# Altium PCB SD2_V1.2.PcbDoc
Units mil, origin at the board's own origin, x right, y up, seen from the top; angles counter-clockwise.
Board outline 1397.64 x 1122.05 mil, 2 copper layers (Top Layer, Bottom Layer), stack 46.457 mil thick; 30 components, 34 nets, 137 pads, 76 vias.
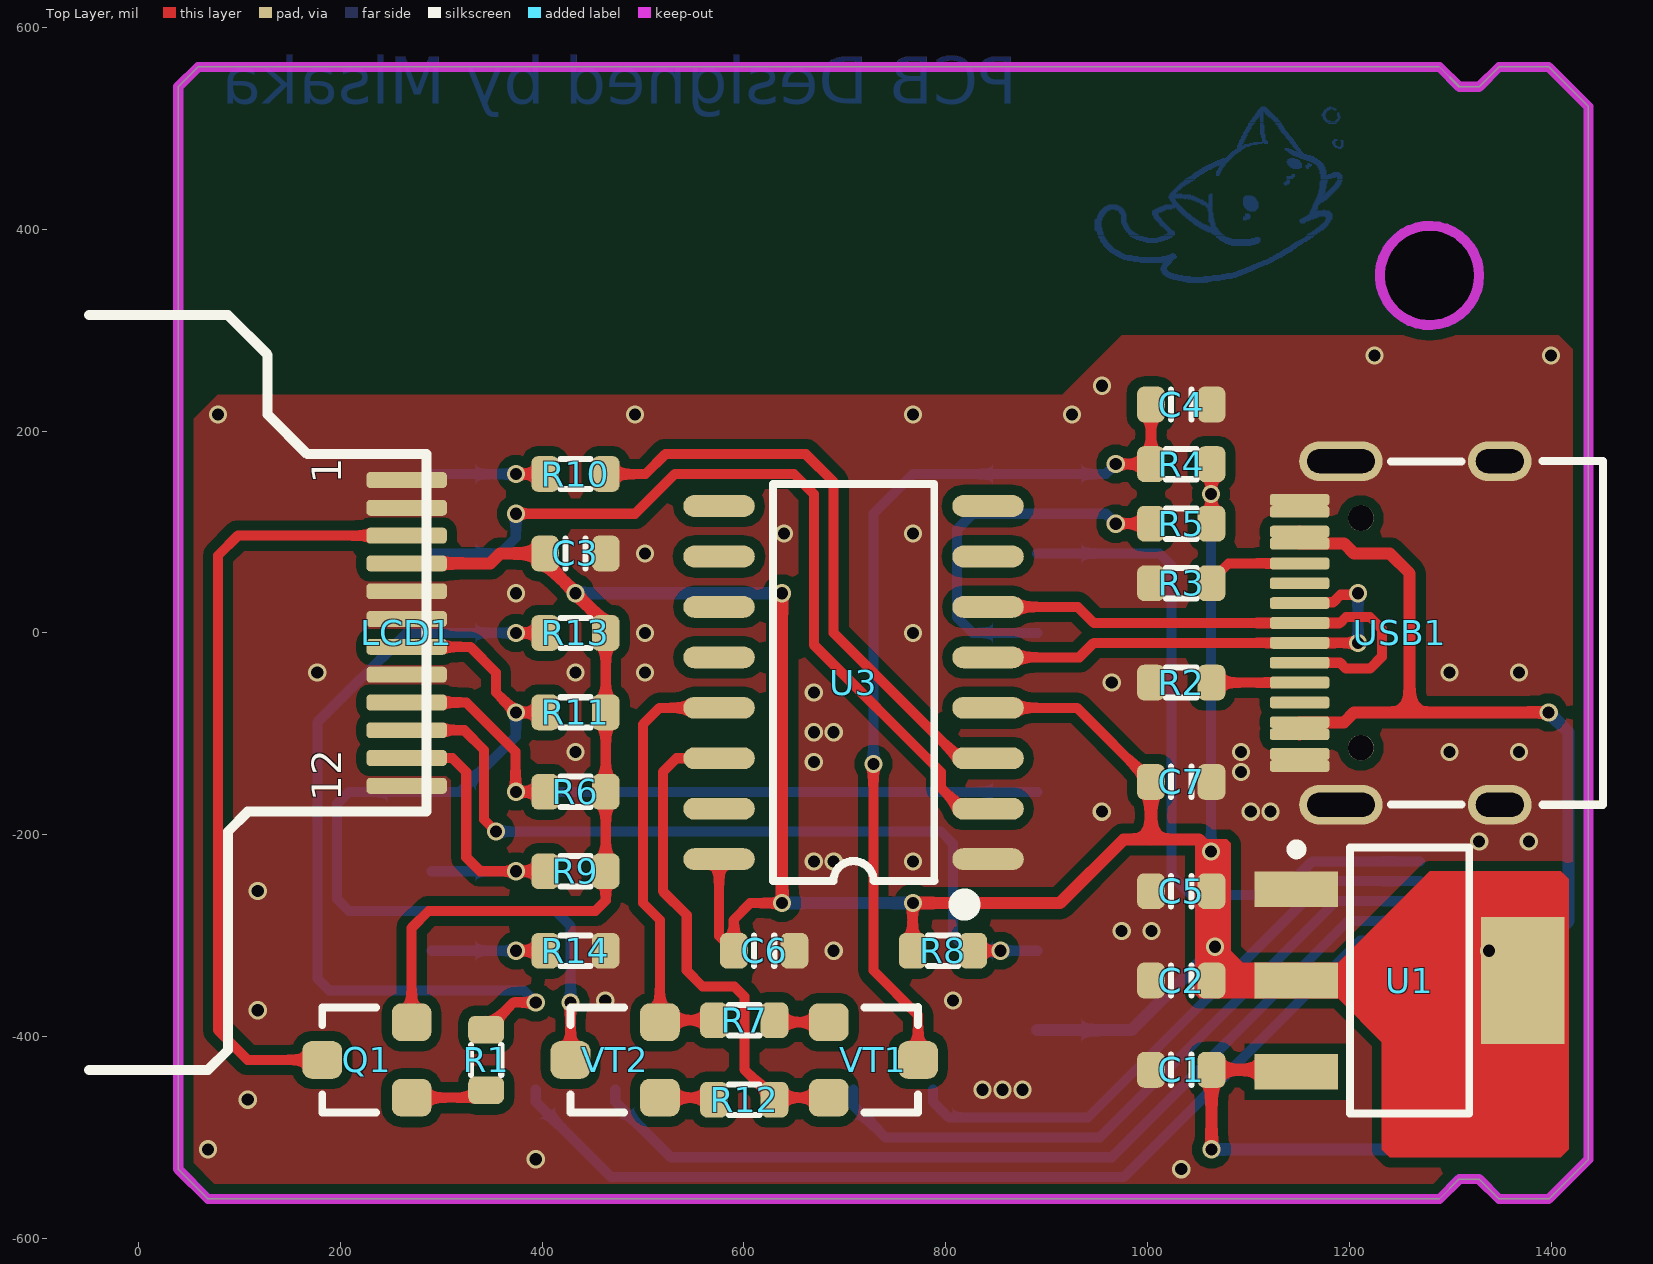
[diagram p0: Top Layer view]
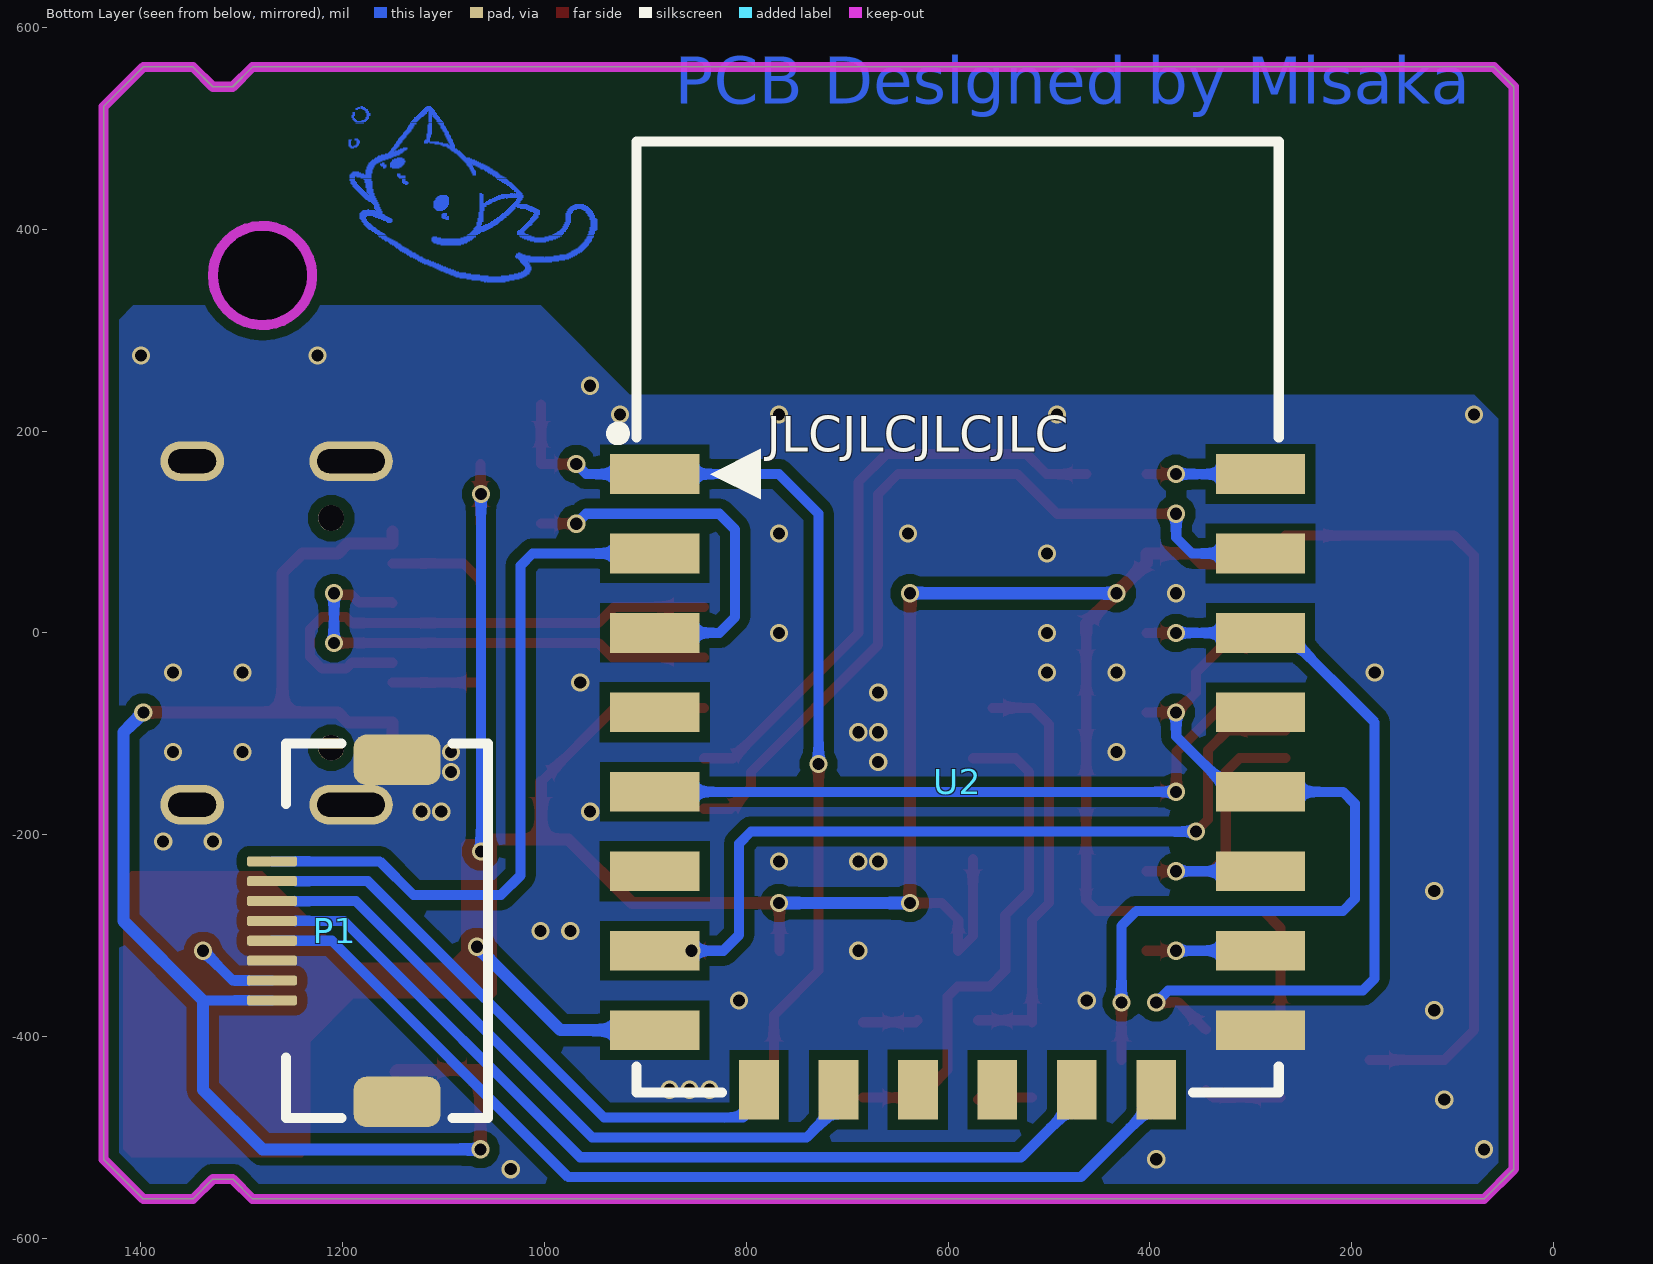
[diagram p1: Bottom Layer view, seen from below]
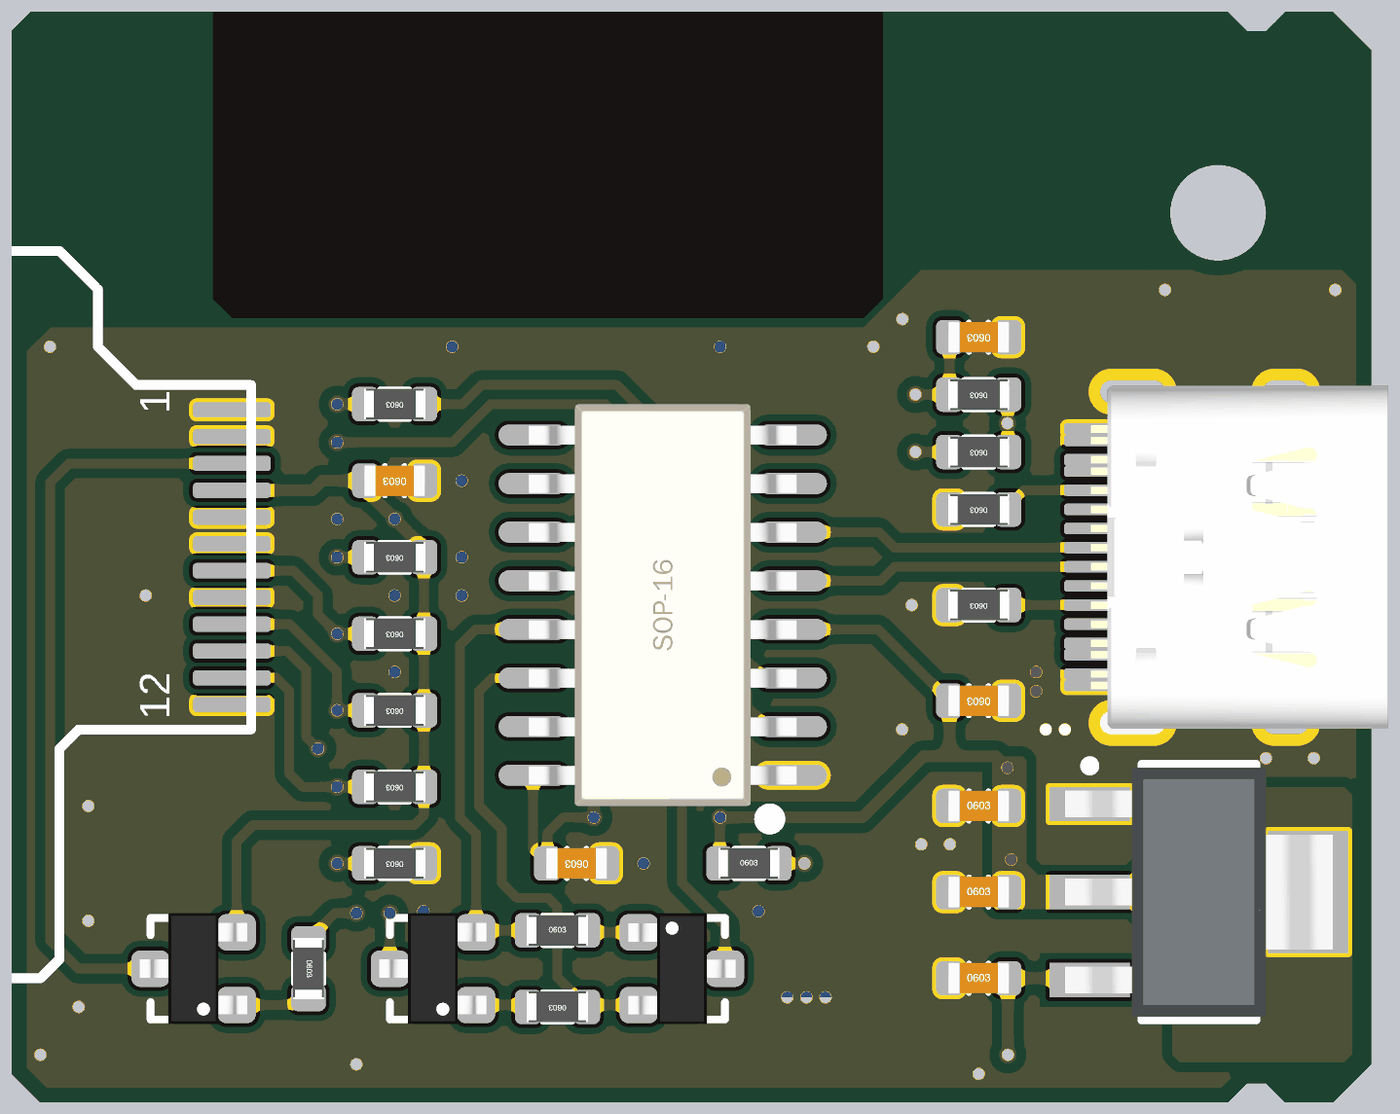
[diagram p2: 3D render of the assembled board from above, using the file's embedded part models]

## Layer stack, top to bottom
Top Solder: solder mask 0.3937, Solder Resist, Dk 3.5
Top Layer: signal copper 1.5748
Dielectric 1: dielectric 43.3071, FR-4, Dk 4.8
Bottom Layer: signal copper 1.5748
Bottom Solder: solder mask 0.3937, Solder Resist, Dk 3.5

## Board outline
68.9,-561.02 1289.37,-561.02 1309.06,-541.34 1328.74,-541.34 1348.43,-561.02 1397.64,-561.02 1437.01,-521.65 1437.01,521.65 1397.64,561.02 1348.43,561.02 1328.74,541.34 1309.06,541.34 1289.37,561.02 59.06,561.02 39.37,541.34 39.37,-531.5
cut-out: 1230.32,354.33 ccw(c1279.53,354.33) 1279.53,305.12 ccw(c1279.53,354.33) 1328.74,354.33 ccw(c1279.53,354.33) 1279.53,403.54 ccw(c1279.53,354.33)

## Design rules (kind name [scope] priority, off if disabled: settings)
Clearance Clearance_1 [InPolygon] p1: gap=10 ignorepadtopadclearanceinfootprint=FALSE
Clearance [All] p2: gap=7 ignorepadtopadclearanceinfootprint=FALSE
PlaneConnect [All] p1: planeconnectstyle=Direct reliefexpansion=20 reliefentries=4 reliefconductorwidth=10 reliefairgap=10
PolygonConnect [All] p1: connectstyle=Direct reliefconductorwidth=10 reliefentries=4 polygonreliefangle="90 Angle" airgapwidth=10
RoutingVias [All] p1: holewidth=28 width=50 viastyle="Through Hole" minholewidth=28 minwidth=50 maxholewidth=28 maxwidth=50
SolderMaskExpansion [All] p1: expansion=4 istentingtop=FALSE
Width [All] p1: maxlimit=50 minlimit=6 preferedwidth=10
29 further rules are at their usual default settings.

## Components (designator, comment, footprint, x,y, rotation, side; value= is the part's Value field where it differs from the comment)
C1 "10uF" C_0603 1033.46,-433.07 r0 top value=0.1u
C2 "10uF" C_0603 1033.46,-344.49 r0 top value=0.1u
C3 "0.1uF" C_0603 433.07,78.74 r180 top value=100pF
C4 "0.1uF" C_0603 1033.46,226.38 r180 top value=100pF
C5 "0.1uF" C_0603 1033.46,-255.91 r0 top value=100pF
C6 "0.1uF" C_0603 620.08,-314.96 r180 top value=100pF
C7 "0.1uF" C_0603 1033.46,-147.64 r180 top value=100pF
LCD1 "ST7789-240x240" LCD-240X240-12P 265.75,0 r90 top
P1 "Header 8" FFC_0.5_8 1181.1,-295.28 r90 bottom
Q1 "AO3415A" SOT-23-y 226.38,-423.23 r90 top
R1 "1K" R_0603 344.49,-423.23 r270 top value=22R
R2 "5.1K" R_0603 1033.46,-49.21 r180 top value=22R
R3 "5.1K" R_0603 1033.46,49.21 r180 top value=22R
R4 "12K" R_0603 1033.46,167.32 r180 top value=22R
R5 "12K" R_0603 1033.46,108.27 r180 top value=22R
R6 "12K" R_0603 433.07,-157.48 r180 top value=22R
R7 "12K" R_0603 600.39,-383.86 r0 top value=22R
R8 "12K" R_0603 797.24,-314.96 r0 top value=22R
R9 "12K" R_0603 433.07,-236.22 r180 top value=22R
R10 "200R" R_0603 433.07,157.48 r180 top value=22R
R11 "12K" R_0603 433.07,-78.74 r180 top value=22R
R12 "12K" R_0603 600.39,-462.6 r180 top value=22R
R13 "12K" R_0603 433.07,0 r180 top value=22R
R14 "12K" R_0603 433.07,-314.96 r180 top value=22R
U1 "AMS1117-3.3" SOT223_y 1259.84,-344.49 r270 top
U2 "ESP8266" 8266 590.55,-147.64 r180 bottom
U3 "CH340C" SOP16N_N 708.66,-49.21 r180 top
USB1 "Type-C" TYPE-C-TOP 1250,0 r0 top
VT1 "S8050" SOT-23-y 728.35,-423.23 r270 top
VT2 "S8050" SOT-23-y 472.44,-423.23 r90 top

## Footprints (in the part's own frame and the unit in brackets; to place one, negate y for a bottom-side part, rotate by r counter-clockwise, add the part's x,y. Pads: shape width x height; smd on the part's side, far side on the other; paste and mask are expansions set on the pad)
8266 [mm]
  rect 2.25x1 smd: 1(-7.625,7.75) 2(-7.625,5.75) 3(-7.625,3.75) 4(-7.625,1.75) 5(-7.625,-0.25) 6(-7.625,-2.25) 7(-7.625,-4.25) 8(-7.625,-6.25) 15(7.625,-6.25) 16(7.625,-4.25) 17(7.625,-2.25) 18(7.625,-0.25) 19(7.625,1.75) 20(7.625,3.75) 21(7.625,5.75) 22(7.625,7.75)
  rect 1x1.5 smd: 9(-5,-7.75) 10(-3,-7.75) 11(-1,-7.75) 12(1,-7.75) 13(3,-7.75) 14(5,-7.75)
  silkscreen extent -8.7,-7.82 8.08,16.12, body extent -8,-7.74 8,16.26, height 2.75
C_0603 [mm]
  rrect50% 0.7x0.9 smd: 1(-0.762,0) 2(0.762,0)
  silkscreen extent -0.25,-0.38 0.25,0.38, body extent -0.8,-0.41 0.8,0.41, height 0.81
FFC_0.5_8 [mil]
  rrect50% 50x86 smd: 0(-169.5,-35) 0(169.5,-35)
  rrect50% 10x50 smd: 1(-68.9,89) 2(-49.21,89) 3(-29.53,89) 4(-9.84,89) 5(9.84,89) 6(29.53,89) 7(49.21,89) 8(68.9,89)
  silkscreen extent -186,-125 186,75, body extent -187,-124 187,87, height 82
LCD-240X240-12P [mm]
  rrect50% 0.4x2.032 smd: 1(3.85,0) 2(3.15,0) 3(2.45,0) 4(1.75,0) 5(1.05,0) 6(0.35,0) 7(-0.35,0) 8(-1.05,0) 9(-1.75,0) 10(-2.45,0) 11(-3.15,0) 12(-3.85,0)
  silkscreen extent -11,-0.5 8,8
R_0603 [mm]
  rrect50% 0.7x0.9 smd: 1(-0.762,0) 2(0.762,0)
  silkscreen extent -0.38,-0.38 0.38,0.38, body extent -0.8,-0.4 0.8,0.4, height 0.4
SOP16N_N [mm] "10.3*7*1.8mm（长宽高）"
  oval 1.8x0.55 smd: 1(-3.385,4.445) 2(-3.385,3.175) 3(-3.385,1.905) 4(-3.385,0.635) 5(-3.385,-0.635) 6(-3.385,-1.905) 7(-3.385,-3.175) 8(-3.385,-4.445) 9(3.385,-4.445) 10(3.385,-3.175) 11(3.385,-1.905) 12(3.385,-0.635) 13(3.385,0.635) 14(3.385,1.905) 15(3.385,3.175) 16(3.385,4.445)
  silkscreen extent -2.95,-5 2.03,5.74, body extent -3.5,-5.25 3.5,5.25, height 1.9
SOT223_y [mm] "SOT223, 4-Leads, Body 6.5x3.5mm, Pitch 2.3mm, Lead Span 7mm, IPC High Density"
  rect 0.9x2.1 smd: 1(-2.3,-2.85) 2(0,-2.85) 3(2.3,-2.85)
  rect 3.2x2.1 smd: 2(0,2.85)
  silkscreen extent -3.42,-2.97 3.35,1.5, body extent -3.25,-3.5 3.25,3.5, height 1.8
SOT-23-y [mm] "Surface mount NPN transistor, package SOT-23"
  rrect50% 0.95x1 smd: 1(-0.95,-1.125) 2(0.95,-1.125) 3(0,1.125)
  silkscreen extent -1.33,-0.22 1.32,1.13, body extent -1.45,-1.4 1.45,1.4, height 1.3
TYPE-C-TOP [mm]
  round 0.65 hole 0.65: 0(-0.98,-2.89) 0(-0.98,2.89)
  oval 1.6x1 hole 0.6 slot 1.2 at 0 deg: 1(2.52,4.325) 2(2.52,-4.325)
  oval 2.1x1 hole 0.6 slot 1.7 at 0 deg: 3(-1.48,-4.325) 4(-1.48,4.325)
  rrect50% 1.5x0.3 smd: A1(-2.52,-3.35) A4(-2.52,-2.55) A5(-2.52,-1.25) A6(-2.52,-0.25) A7(-2.52,0.25) A8(-2.52,1.25) A9(-2.52,2.55) A12(-2.52,3.35) B1(-2.52,3.05) B4(-2.52,2.25) B5(-2.52,1.75) B6(-2.52,0.75) B7(-2.52,-0.75) B8(-2.52,-1.75) B9(-2.52,-2.25) B12(-2.52,-3.05)
  silkscreen extent -0.22,-4.33 5.12,4.33, body extent -2.57,-4.48 5.18,4.48, height 3.26

## Part data
C1 C2: library part 电容-0402, "Capacitor"
C3 C4 C5 C6 C7: library part Cap, "Capacitor", LatestRevisionDate=17-Jul-2002, LatestRevisionNote="Re-released for DXP Platform.", PackageDescription="Radial Cap, Thru-Hole; 2 Leads; 0.3 in Pin Spacing", PackageReference=RAD-0.3, Published=8-Jun-2000, Publisher="Altium Limited"
LCD1: library part LCD-240x240, "显示屏"
P1: "Header, 8-Pin", LatestRevisionDate=17-Jul-2002, LatestRevisionNote="Re-released for DXP Platform.", Publisher="Altium Limited"
Q1: "MOSFET", LatestRevisionDate=17-Jul-2002, LatestRevisionNote="Re-released for DXP Platform.", PackageDescription="TO, Flat Index; 3 In-Line, Axial Leads; Body Dia. 4.6mm; Lead Dia. 0.5 mm (max)", PackageReference=E3, PackageVersion=1995/1996, Published=8-Jun-2000, Publisher="Altium Limited"
R1 R2 R3 R4 R5 R6 R7 R8 R9 R10 R11 R12 R13 R14: library part 电阻-0402, "Resistor"
U1: library part LM317M
USB1: library part USB-Type-C-TOP
VT1 VT2: library part SMT_TRIODE_NPN, "Surface mount NPN transistor, package SOT-23"

## Via types
v1: diameter 18, hole 12, Top Layer to Bottom Layer, tented both sides, 76 vias

## Nets (pads, with @x,y where several pads share a name; then routed paths per layer and width w, separated by ;. In a path a pad name is that pad's centre, name@x,y a point inside that pad or via, vN(x,y) a via of type N, cw(c..) or ccw(c..) an arc to the next point about the centre after c; other vN are vias at no path point)
3V3: C2.2 C3.2 C5.2 C6.2 C7.2 LCD1.4 P1.2 Q1.2 R4.1 R5.1 R6.1 R8.1 R9.1 R11.1 R13.1 U1.2 U2.8 U3.4 U3.16 | length 2958.7
  Top Layer w10: Q1.2 270.67,-292.32 287.4,-275.59 452.76,-275.59 463.07,-265.28 R9.1 R6.1 R11.1 R13.1 ; U3.16 575.39,-300.27 C6.2 590.09,-283.93 606.3,-267.72 v1(637.8,-267.72) ; R8.1 767.24,-268.19 v1(767.72,-267.72) ; U3.4 930.05,-74.21 C7.2 ; R5.1 R4.1
  Top Layer w12: LCD1.4 348.53,68.9 358.38,78.74 C3.2 403.08,69.36 v1(433.07,39.37) 463.07,9.37 R13.1 ; v1(637.8,-267.72) v1(637.8,39.37) ; v1(767.72,-267.72) 913.39,-267.72 976.38,-204.72 1003.47,-204.72 ; C7.2 1003.47,-204.72 ; v1(1062.99,-216.54) 1051.18,-204.72 1003.47,-204.72
  Bottom Layer w10: v1(1062.99,-216.54) v1(1062.99,137.8) ; P1.2 1309.05,-344.49 v1(1338.58,-314.96)
  Bottom Layer w12: v1(433.07,39.37) v1(637.8,39.37) ; v1(637.8,-267.72) v1(767.72,-267.72) ; U2.8 984.25,-393.7 v1(1066.93,-311.02)
ADC: P1.8 U2.2 | length 713.3
  Bottom Layer w10: U2.2 1011.81,78.74 1023.62,66.93 1023.62,-240.16 1043.31,-259.84 1129.92,-259.84 1163.39,-226.38 P1.8
CC1: R2.1 USB1.A5 | length 87.3
  Top Layer w10: R2.1 USB1.A5
CC2: R3.1 USB1.B5 | length 97.2
  Top Layer w10: R3.1 1063.46,52.13 1080.24,68.9 USB1.B5
CS0: P1.7 U2.9 | length 598.1
  Bottom Layer w10: U2.9 787.4,-464.57 803.15,-480.32 940.94,-480.32 1175.2,-246.06 P1.7
DC: LCD1.7 R11.2 U2.18 VT2.3 | length 873.9
  Top Layer w10: LCD1.7 328.74,-13.78 354.33,-39.37 354.33,-59.06 v1(374.02,-78.74) R11.2 ; VT2.3 v1(428.15,-366.14)
  Bottom Layer w10: v1(374.02,-78.74) 374.02,-102.36 318.9,-157.48 U2.18 208.66,-157.48 196.85,-169.29 196.85,-263.78 208.66,-275.59 413.39,-275.59 428.15,-290.35 v1(428.15,-366.14)
DTR: R7.1 U3.13 VT2.2 | length 419.2
  Top Layer w10: U3.13@555.71,-74.21 516.34,-74.21 500,-90.55 500,-267.72 516.73,-284.45 VT2.2 518.7,-383.86 R7.1
EN: R5.2 U2.3 | length 375.9
  Top Layer w10: v1(968.5,108.27) R5.2
  Bottom Layer w10: U2.3 826.77,0 811.02,15.75 811.02,102.36 826.77,118.11 958.66,118.11 v1(968.5,108.27)
GND: C1.1 C2.1 C3.1 C4.1 C5.1 C6.1 C7.1 LCD1.1 LCD1.2 LCD1.5 LCD1.6 LCD1.8 LCD1.12 P1.0 P1.3 R2.2 R3.2 R14.1 U1.1 U2.15 U3.1 USB1.1 USB1.2 USB1.3 USB1.4 USB1.A1 USB1.A12 USB1.B1 USB1.B12
  other v1: 1033.46,-531.5 393.7,-521.65 68.9,-511.81 108.27,-462.6 836.61,-452.76 856.3,-452.76 875.98,-452.76 118.11,-374.02 462.6,-364.17 807.09,-364.17 688.98,-314.96 974.41,-295.28 1003.94,-295.28 118.11,-255.91 669.29,-226.38 688.98,-226.38 767.72,-226.38 1328.74,-206.69 1377.95,-206.69 954.72,-177.17 1102.36,-177.17 1122.05,-177.17 1092.52,-137.8 669.29,-127.95 433.07,-118.11 1092.52,-118.11 1299.21,-118.11 1368.11,-118.11 669.29,-98.43 688.98,-98.43 669.29,-59.06 964.57,-49.21 177.17,-39.37 433.07,-39.37 501.97,-39.37 1299.21,-39.37 1368.11,-39.37 501.97,0 767.72,0 374.02,39.37 501.97,78.74 639.76,98.43 767.72,98.43 78.74,216.54 492.13,216.54 767.72,216.54 925.2,216.54 955,245 1225,275 1400,275
GPIO2: LCD1.11 R9.2 U2.17 | length 317.1
  Top Layer w10: LCD1.11 311.02,-124.02 324.8,-137.8 324.8,-222.44 338.58,-236.22 v1(374.02,-236.22) R9.2
  Bottom Layer w10: U2.17 v1(374.02,-236.22)
GPIO4: U2.19
GPIO5: R1.1 R13.2 U2.20 | length 803.3
  Top Layer w10: R1.1 371.57,-366.14 v1(393.7,-366.14) ; v1(374.02,0) R13.2
  Bottom Layer w10: v1(374.02,0) 307.09,0 U2.20 265.75,0 177.17,-88.58 177.17,-342.52 188.98,-354.33 381.89,-354.33 v1(393.7,-366.14)
GPIO9: U2.11
GPIO10: U2.12
GPIO12: U2.6
GPIO13: LCD1.10 R8.2 U2.7 | length 836
  Top Layer w10: LCD1.10 322.83,-96.46 342.31,-115.93 342.31,-184.83 v1(354.33,-196.85) ; R8.2 v1(854.33,-314.96)
  Bottom Layer w10: v1(354.33,-196.85) 795.28,-196.85 807.09,-208.66 807.09,-299.21 822.83,-314.96 v1(854.33,-314.96) U2.7
GPIO14: LCD1.9 R6.2 U2.5 | length 713.3
  Top Layer w10: LCD1.9 324.8,-68.9 373.64,-117.73 v1@373.64,-157.1 ; v1(374.02,-157.48) R6.2
  Bottom Layer w10: v1(374.02,-157.48) U2.5
GPIO15: R14.2 U2.16 | length 112.7
  Top Layer w10: v1(374.02,-314.96) R14.2
  Bottom Layer w10: U2.16 v1(374.02,-314.96)
GPIO16: U2.4
LCD_BL_VCC: LCD1.3 Q1.3 | length 781.2
  Top Layer w10: Q1.3 108.27,-423.23 78.74,-393.7 78.74,76.8 98.4,96.46 LCD1.3
MISO0: P1.6 U2.10 | length 687.3
  Bottom Layer w10: U2.10 708.66,-468.5 740.16,-500 952.76,-500 1187.01,-265.75 P1.6
MOSI0: P1.5 U2.13 | length 929.3
  Bottom Layer w10: U2.13 472.44,-464.57 527.56,-519.68 964.57,-519.68 1198.82,-285.43 P1.5
NetQ1_1: Q1.1 R1.2 | length 76.9
  Top Layer w10: Q1.1 337.08,-460.63 R1.2
NetR7_2: R7.2 VT1.1 | length 54.5
  Top Layer w10: R7.2 632.36,-385.83 VT1.1
NetR10_1: R10.1 U3.3 | length 599.5
  Top Layer w10: R10.1 502.44,157.48 522.13,177.17 661.42,177.17 688.98,149.61 688.98,0 813.19,-124.21 U3.3
NetR12_2: R12.2 VT2.1 | length 54.5
  Top Layer w10: VT2.1 568.43,-460.63 R12.2
REST: C4.2 R4.2 U2.1 VT1.3 | length 914.2
  Top Layer w10: v1(728.35,-129.92) 728.35,-334.65 772.64,-378.94 VT1.3 ; v1(968.5,167.32) R4.2 C4.2
  Bottom Layer w10: v1(728.35,-129.92) 728.35,118.11 767.72,157.48 U2.1 958.66,157.48 v1(968.5,167.32)
RTS: R12.1 U3.14 VT1.2 | length 504.9
  Top Layer w10: U3.14 533.27,-124.21 519.68,-137.8 519.68,-255.91 543.31,-279.53 543.31,-334.65 559.06,-350.39 590.55,-350.39 600.39,-360.24 600.39,-432.6 R12.1 632.36,-460.63 VT1.2
RXD: U2.21 U3.2 | length 832.3
  Top Layer w10: v1(374.02,118.11) 492.13,118.11 531.5,157.48 649.61,157.48 669.29,137.8 669.29,-11.81 795.28,-137.8 795.28,-153.54 815.94,-174.21 U3.2
  Bottom Layer w10: U2.21 358.27,78.74 374.02,94.49 v1(374.02,118.11)
SCLK0: P1.4 U2.14 | length 1016.2
  Bottom Layer w10: U2.14 393.7,-464.57 468.5,-539.37 976.38,-539.37 1210.63,-305.12 P1.4
TXD: R10.2 U2.22 | length 112.7
  Top Layer w10: v1(374.02,157.48) R10.2
  Bottom Layer w10: U2.22 v1(374.02,157.48)
USB_D+: U3.5 USB1.A6 USB1.B6 | length 483.8
  Top Layer w10: U3.5 932.48,-24.21 946.85,-9.84 USB1.A6 v1(1208.66,-9.84) ; USB1.B6 1151.69,30.43 1183.98,30.43 1191.38,37.84 1207.13,37.84 v1(1208.66,39.37)
  Bottom Layer w10: v1(1208.66,-9.84) v1(1208.66,39.37)
USB_D-: U3.6 USB1.A7 USB1.B7 | length 520.7
  Top Layer w10: U3.6 930.91,25.79 946.85,9.84 1190.94,9.84 1196.85,15.75 1220.47,15.75 1232.28,3.94 1232.28,-23.62 1220.47,-35.43 1196.85,-35.43 1190.94,-29.53 USB1.B7
VDD_5V: C1.2 P1.1 U1.3 USB1.A4 USB1.A9 USB1.B4 USB1.B9 | length 1480.2
  Top Layer w12: v1(1063.46,-511.81) C1.2 1145.67,-433.07 U1.3 ; USB1.A4 USB1.B9 1194.88,-88.58 1204.72,-78.74 1259.84,-78.74 ; USB1.A9 USB1.B4 1194.88,88.58 1204.72,78.74 1240.16,78.74 1259.84,59.06 1259.84,-78.74 ; v1(1397.64,-78.74) 1259.84,-78.74
  Bottom Layer w10: P1.1 1338.58,-364.17
  Bottom Layer w12: v1(1063.46,-511.81) 1279.53,-511.81 1338.58,-452.76 1338.58,-364.17 1417.32,-285.43 1417.32,-98.43 v1(1397.64,-78.74)
pads on no net: U3.7 U3.8 U3.9 U3.10 U3.11 U3.12 U3.15 USB1.0 USB1.A8 USB1.B8
copper on no net: | length 5808
  Bottom Layer w1: 947.96,399.41 954.96,399.41 ; 947.96,400.41 954.96,400.41 ; 947.96,401.41 954.96,401.41 ; 947.96,402.41 953.96,402.41 ; 947.96,403.41 953.96,403.41 ; 947.96,404.41 953.96,404.41 ; 947.96,405.41 953.96,405.41 ; 947.96,406.41 953.96,406.41 ; 947.96,407.41 953.96,407.41 ; 947.96,408.41 953.96,408.41 ; 947.96,409.41 954.96,409.41 ; 948.96,398.41 954.96,398.41 ; 948.96,410.41 954.96,410.41 ; 949.96,395.41 955.96,395.41 ; 949.96,396.41 955.96,396.41 ; 949.96,397.41 955.96,397.41 ; 949.96,411.41 954.96,411.41 ; 949.96,412.41 955.96,412.41 ; 949.96,413.41 956.96,413.41 ; 950.96,392.41 957.96,392.41 ; 950.96,393.41 956.96,393.41 ; 950.96,394.41 956.96,394.41 ; 950.96,414.41 956.96,414.41 ; 950.96,415.41 957.96,415.41 ; 951.96,391.41 957.96,391.41 ; 951.96,416.41 958.96,416.41 ; 951.96,417.41 958.96,417.41 ; 952.96,388.41 959.96,388.41 ; 952.96,389.41 959.96,389.41 ; 952.96,390.41 958.96,390.41 ; 952.96,418.41 960.96,418.41 ; 953.96,387.41 960.96,387.41 ; 953.96,419.41 962.96,419.41 ; 954.96,386.41 961.96,386.41 ; 954.96,420.41 975.96,420.41 ; 955.96,384.41 963.96,384.41 ; 955.96,385.41 962.96,385.41 ; 955.96,421.41 974.96,421.41 ; 956.96,383.41 964.96,383.41 ; 956.96,422.41 973.96,422.41 ; 957.96,382.41 965.96,382.41 ; 958.96,381.41 966.96,381.41 ; 958.96,423.41 971.96,423.41 ; 959.96,380.41 968.96,380.41 ; 960.96,379.41 970.96,379.41 ; 960.96,424.41 969.96,424.41 ; 961.96,378.41 972.96,378.41 ; 962.96,377.41 973.96,377.41 ; 964.96,376.41 975.96,376.41 ; 966.96,375.41 977.96,375.41 ; 967.96,374.41 984.96,374.41 ; 967.96,419.41 976.96,419.41 ; 969.96,373.41 990.96,373.41 ; 970.96,418.41 976.96,418.41 ; 971.96,372.41 999.96,372.41 ; 971.96,416.41 977.96,416.41 ; 971.96,417.41 977.96,417.41 ; 972.96,415.41 978.96,415.41 ; 973.96,371.41 1027.96,371.41 ; 973.96,406.41 979.96,406.41 ; 973.96,407.41 978.96,407.41 ; 973.96,408.41 978.96,408.41 ; 973.96,409.41 978.96,409.41 ; 973.96,410.41 978.96,410.41 ; 973.96,411.41 978.96,411.41 ; 973.96,412.41 978.96,412.41 ; 973.96,413.41 978.96,413.41 ; 973.96,414.41 978.96,414.41 ; 974.96,404.41 980.96,404.41 ; 974.96,405.41 979.96,405.41 ; 975.96,370.41 1025.96,370.41 ; 975.96,402.41 981.96,402.41 ; 975.96,403.41 980.96,403.41 ; 976.96,400.41 982.96,400.41 ; 976.96,401.41 981.96,401.41 ; 977.96,399.41 983.96,399.41 ; 978.96,397.41 986.96,397.41 ; 978.96,398.41 984.96,398.41 ; 979.96,369.41 1024.96,369.41 ; 980.96,395.41 989.96,395.41 ; 980.96,396.41 987.96,396.41 ; 981.96,394.41 991.96,394.41 ; 982.96,393.41 995.96,393.41 ; 984.96,392.41 999.96,392.41 ; 985.96,368.41 1023.96,368.41 ; 986.96,391.41 1021.96,391.41 ; 988.96,390.41 1019.96,390.41 ; 991.96,389.41 1016.96,389.41 ; 992.96,367.41 1014.96,367.41 ; 995.96,388.41 1013.96,388.41 ; 998.96,387.41 1009.96,387.41 ; 1000.96,372.41 1028.96,372.41 ; 1004.96,414.41 1010.96,414.41 ; 1004.96,415.41 1009.96,415.41 ; 1004.96,416.41 1010.96,416.41 ; 1004.96,417.41 1013.96,417.41 ; 1004.96,418.41 1015.96,418.41 ; 1005.96,411.41 1012.96,411.41 ; 1005.96,412.41 1011.96,412.41 ; 1005.96,413.41 1010.96,413.41 ; 1005.96,419.41 1017.96,419.41 ; 1006.96,410.41 1013.96,410.41 ; 1007.96,409.41 1013.96,409.41 ; 1007.96,420.41 1023.96,420.41 ; 1008.96,408.41 1014.96,408.41 ; 1009.96,392.41 1023.96,392.41 ; 1009.96,407.41 1015.96,407.41 ; 1009.96,421.41 1026.96,421.41 ; 1010.96,406.41 1016.96,406.41 ; 1011.96,404.41 1018.96,404.41 ; 1011.96,405.41 1017.96,405.41 ; 1011.96,422.41 1033.96,422.41 ; 1012.96,359.41 1019.96,359.41 ; 1012.96,360.41 1018.96,360.41 ; 1012.96,361.41 1018.96,361.41 ; 1012.96,362.41 1018.96,362.41 ; 1012.96,393.41 1024.96,393.41 ; 1012.96,403.41 1019.96,403.41 ; 1013.96,357.41 1022.96,357.41 ; 1013.96,358.41 1020.96,358.41 ; 1013.96,363.41 1019.96,363.41 ; 1013.96,364.41 1020.96,364.41 ; 1013.96,373.41 1028.96,373.41 ; 1014.96,355.41 1029.96,355.41 ; 1014.96,356.41 1025.96,356.41 ; 1014.96,365.41 1021.96,365.41 ; 1014.96,366.41 1022.96,366.41 ; 1014.96,402.41 1020.96,402.41 ; 1014.96,423.41 1032.96,423.41 ; 1015.96,367.41 1023.96,367.41 ; 1015.96,394.41 1026.96,394.41 ; 1015.96,401.41 1021.96,401.41 ; 1016.96,354.41 1034.96,354.41 ; 1016.96,400.41 1022.96,400.41 ; 1016.96,424.41 1031.96,424.41 ; 1017.96,353.41 1042.96,353.41 ; 1017.96,399.41 1023.96,399.41 ; 1018.96,374.41 1027.96,374.41 ; 1018.96,395.41 1026.96,395.41 ; 1018.96,398.41 1025.96,398.41 ; 1019.96,352.41 1087.96,352.41 ; 1019.96,396.41 1026.96,396.41 ; 1019.96,397.41 1026.96,397.41 ; 1020.96,431.41 1049.96,431.41 ; 1020.96,432.41 1047.96,432.41 ; 1020.96,433.41 1045.96,433.41 ; 1021.96,351.41 1083.96,351.41 ; 1021.96,375.41 1027.96,375.41 ; 1021.96,429.41 1027.96,429.41 ; 1021.96,430.41 1026.96,430.41 ; 1021.96,434.41 1042.96,434.41 ; 1021.96,435.41 1027.96,435.41 ; 1022.96,428.41 1027.96,428.41 ; 1022.96,436.41 1027.96,436.41 ; 1023.96,376.41 1025.96,376.41 ; 1023.96,426.41 1029.96,426.41 ; 1023.96,427.41 1028.96,427.41 ; 1023.96,437.41 1029.96,437.41 ; 1024.96,350.41 1076.96,350.41 ; 1024.96,425.41 1030.96,425.41 ; 1024.96,438.41 1029.96,438.41 ; 1025.96,439.41 1031.96,439.41 ; 1026.96,440.41 1032.96,440.41 ; 1027.96,441.41 1033.96,441.41 ; 1028.96,420.41 1035.96,420.41 ; 1028.96,421.41 1034.96,421.41 ; 1028.96,435.41 1029.96,435.41 ; 1028.96,442.41 1034.96,442.41 ; 1029.96,349.41 1071.96,349.41 ; 1029.96,419.41 1036.96,419.41 ; 1029.96,443.41 1036.96,443.41 ; 1030.96,418.41 1037.96,418.41 ; 1030.96,435.41 1033.96,435.41 ; 1030.96,444.41 1037.96,444.41 ; 1031.96,417.41 1038.96,417.41 ; 1031.96,445.41 1039.96,445.41 ; 1032.96,416.41 1039.96,416.41 ; 1032.96,446.41 1041.96,446.41 ; 1033.96,415.41 1041.96,415.41 ; 1034.96,348.41 1062.96,348.41 ; 1034.96,414.41 1042.96,414.41 ; 1034.96,447.41 1042.96,447.41 ; 1035.96,413.41 1043.96,413.41 ; 1035.96,448.41 1044.96,448.41 ; 1036.96,430.41 1037.96,430.41 ; 1036.96,449.41 1046.96,449.41 ; 1037.96,411.41 1046.96,411.41 ; 1037.96,412.41 1044.96,412.41 ; 1037.96,450.41 1047.96,450.41 ; 1038.96,347.41 1056.96,347.41 ; 1039.96,410.41 1047.96,410.41 ; 1039.96,430.41 1051.96,430.41 ; 1039.96,451.41 1048.96,451.41 ; 1040.96,409.41 1049.96,409.41 ; 1041.96,408.41 1050.96,408.41 ; 1041.96,452.41 1050.96,452.41 ; 1043.96,407.41 1052.96,407.41 ; 1043.96,429.41 1054.96,429.41 ; 1043.96,453.41 1051.96,453.41 ; 1044.96,406.41 1053.96,406.41 ; 1044.96,454.41 1053.96,454.41 ; 1045.96,405.41 1055.96,405.41 ; 1045.96,455.41 1055.96,455.41 ; 1046.96,404.41 1058.96,404.41 ; 1046.96,428.41 1055.96,428.41 ; 1046.96,456.41 1056.96,456.41 ; 1048.96,403.41 1060.96,403.41 ; 1048.96,427.41 1057.96,427.41 ; 1048.96,457.41 1058.96,457.41 ; 1050.96,402.41 1067.96,402.41 ; 1050.96,458.41 1059.96,458.41 ; 1051.96,401.41 1068.96,401.41 ; 1051.96,426.41 1058.96,426.41 ; 1051.96,459.41 1062.96,459.41 ; 1052.96,425.41 1063.96,425.41 ; 1053.96,400.41 1069.96,400.41 ; 1053.96,460.41 1063.96,460.41 ; 1054.96,424.41 1063.96,424.41 ; 1054.96,461.41 1065.96,461.41 ; 1055.96,353.41 1089.96,353.41 ; 1055.96,399.41 1069.96,399.41 ; 1056.96,462.41 1067.96,462.41 ; 1057.96,347.41 1059.96,347.41 ; 1057.96,398.41 1070.96,398.41 ; 1057.96,422.41 1063.96,422.41 ; 1057.96,423.41 1063.96,423.41 ; 1058.96,463.41 1070.96,463.41 ; 1059.96,397.41 1071.96,397.41 ; 1059.96,418.41 1063.96,418.41 ; 1059.96,419.41 1063.96,419.41 ; 1059.96,420.41 1063.96,420.41 ; 1059.96,421.41 1063.96,421.41 ; 1060.96,407.41 1065.96,407.41 ; 1060.96,408.41 1065.96,408.41 ; 1060.96,409.41 1065.96,409.41 ; 1060.96,410.41 1065.96,410.41 ; 1060.96,411.41 1064.96,411.41 ; 1060.96,412.41 1064.96,412.41 ; 1060.96,413.41 1064.96,413.41 ; 1060.96,414.41 1064.96,414.41 ; 1060.96,415.41 1064.96,415.41 ; 1060.96,416.41 1064.96,416.41 ; 1060.96,417.41 1063.96,417.41 ; 1060.96,426.41 1063.96,426.41 ; 1060.96,427.41 1063.96,427.41 ; 1060.96,428.41 1063.96,428.41 ; 1060.96,429.41 1063.96,429.41 ; 1060.96,430.41 1063.96,430.41 ; 1060.96,431.41 1063.96,431.41 ; 1060.96,432.41 1063.96,432.41 ; 1060.96,433.41 1063.96,433.41 ; 1060.96,434.41 1063.96,434.41 ; 1060.96,464.41 1076.96,464.41 ; 1061.96,404.41 1066.96,404.41 ; 1061.96,405.41 1066.96,405.41 ; 1061.96,406.41 1066.96,406.41 ; 1061.96,435.41 1063.96,435.41 ; 1062.96,396.41 1072.96,396.41 ; 1062.96,403.41 1066.96,403.41 ; 1062.96,465.41 1077.96,465.41 ; 1063.96,354.41 1092.96,354.41 ; 1063.96,395.41 1073.96,395.41 ; 1064.96,466.41 1078.96,466.41 ; 1065.96,394.41 1075.96,394.41 ; 1066.96,467.41 1079.96,467.41 ; 1067.96,392.41 1079.96,392.41 ; 1067.96,393.41 1076.96,393.41 ; 1067.96,453.41 1070.96,453.41 ; 1067.96,454.41 1070.96,454.41 ; 1067.96,455.41 1071.96,455.41 ; 1067.96,456.41 1071.96,456.41 ; 1067.96,457.41 1072.96,457.41 ; 1068.96,458.41 1072.96,458.41 ; 1068.96,468.41 1080.96,468.41 ; 1069.96,391.41 1082.96,391.41 ; 1069.96,459.41 1073.96,459.41 ; 1069.96,460.41 1073.96,460.41 ; 1070.96,390.41 1111.96,390.41 ; 1070.96,461.41 1074.96,461.41 ; 1070.96,462.41 1075.96,462.41 ; 1071.96,389.41 1111.96,389.41 ; 1071.96,463.41 1076.96,463.41 ; 1071.96,469.41 1081.96,469.41 ; 1072.96,355.41 1094.96,355.41 ; 1073.96,388.41 1111.96,388.41 ; 1073.96,470.41 1082.96,470.41 ; 1075.96,387.41 1110.96,387.41 ; 1076.96,386.41 1109.96,386.41 ; 1077.96,356.41 1097.96,356.41 ; 1077.96,471.41 1083.96,471.41 ; 1078.96,472.41 1084.96,472.41 ; 1079.96,385.41 1106.96,385.41 ; 1079.96,473.41 1085.96,473.41 ; 1080.96,474.41 1086.96,474.41 ; 1081.96,475.41 1088.96,475.41 ; 1082.96,384.41 1102.96,384.41 ; 1082.96,476.41 1089.96,476.41 ; 1083.96,477.41 1091.96,477.41 ; 1084.96,357.41 1099.96,357.41 ; 1085.96,478.41 1092.96,478.41 ; 1086.96,479.41 1093.96,479.41 ; 1087.96,358.41 1102.96,358.41 ; 1088.96,480.41 1095.96,480.41 ; 1088.96,481.41 1096.96,481.41 ; 1088.96,482.41 1100.96,482.41 ; 1088.96,483.41 1093.96,483.41 ; 1089.96,359.41 1104.96,359.41 ; 1089.96,484.41 1093.96,484.41 ; 1089.96,485.41 1094.96,485.41 ; 1090.96,486.41 1094.96,486.41 ; 1090.96,487.41 1095.96,487.41 ; 1090.96,488.41 1095.96,488.41 ; 1091.96,489.41 1096.96,489.41 ; 1092.96,360.41 1106.96,360.41 ; 1092.96,490.41 1096.96,490.41 ; 1092.96,491.41 1097.96,491.41 ; 1092.96,492.41 1097.96,492.41 ; 1093.96,493.41 1098.96,493.41 ; 1094.96,409.41 1097.96,409.41 ; 1094.96,410.41 1100.96,410.41 ; 1094.96,411.41 1101.96,411.41 ; 1094.96,412.41 1096.96,412.41 ; 1094.96,424.41 1109.96,424.41 ; 1094.96,425.41 1109.96,425.41 ; 1094.96,426.41 1109.96,426.41 ; 1094.96,427.41 1109.96,427.41 ; 1094.96,428.41 1108.96,428.41 ; 1094.96,429.41 1107.96,429.41 ; 1094.96,430.41 1107.96,430.41 ; 1094.96,431.41 1106.96,431.41 ; 1094.96,483.41 1102.96,483.41 ; 1094.96,494.41 1098.96,494.41 ; 1094.96,495.41 1098.96,495.41 ; 1094.96,496.41 1099.96,496.41 ; 1095.96,361.41 1108.96,361.41 ; 1095.96,422.41 1109.96,422.41 ; 1095.96,423.41 1109.96,423.41 ; 1095.96,432.41 1105.96,432.41 ; 1095.96,484.41 1108.96,484.41 ; 1095.96,497.41 1100.96,497.41 ; 1096.96,413.41 1101.96,413.41 ; 1096.96,414.41 1101.96,414.41 ; 1096.96,415.41 1100.96,415.41 ; 1096.96,421.41 1109.96,421.41 ; 1096.96,433.41 1103.96,433.41 ; 1096.96,498.41 1100.96,498.41 ; 1096.96,499.41 1101.96,499.41 ; 1097.96,362.41 1110.96,362.41 ; 1097.96,412.41 1101.96,412.41 ; 1097.96,420.41 1108.96,420.41 ; 1097.96,500.41 1102.96,500.41 ; 1097.96,501.41 1102.96,501.41 ; 1098.96,419.41 1107.96,419.41 ; 1098.96,502.41 1102.96,502.41 ; 1099.96,503.41 1103.96,503.41 ; 1099.96,504.41 1104.96,504.41 ; 1099.96,505.41 1105.96,505.41 ; 1100.96,363.41 1113.96,363.41 ; 1100.96,418.41 1106.96,418.41 ; 1100.96,485.41 1113.96,485.41 ; 1100.96,506.41 1106.96,506.41 ; 1101.96,507.41 1106.96,507.41 ; 1102.96,364.41 1115.96,364.41 ; 1102.96,391.41 1111.96,391.41 ; 1102.96,508.41 1107.96,508.41 ; 1103.96,509.41 1108.96,509.41 ; 1103.96,510.41 1109.96,510.41 ; 1104.96,365.41 1118.96,365.41 ; 1104.96,486.41 1118.96,486.41 ; 1104.96,511.41 1110.96,511.41 ; 1105.96,512.41 1110.96,512.41 ; 1106.96,392.41 1110.96,392.41 ; 1106.96,513.41 1114.96,513.41 ; 1106.96,514.41 1114.96,514.41 ; 1107.96,366.41 1120.96,366.41 ; 1107.96,515.41 1114.96,515.41 ; 1108.96,516.41 1114.96,516.41 ; 1108.96,517.41 1120.96,517.41 ; 1109.96,367.41 1122.96,367.41 ; 1109.96,518.41 1119.96,518.41 ; 1110.96,519.41 1118.96,519.41 ; 1111.96,494.41 1116.96,494.41 ; 1111.96,495.41 1115.96,495.41 ; 1111.96,496.41 1115.96,496.41 ; 1111.96,497.41 1115.96,497.41 ; 1111.96,498.41 1115.96,498.41 ; 1111.96,499.41 1115.96,499.41 ; 1111.96,500.41 1115.96,500.41 ; 1111.96,501.41 1115.96,501.41 ; 1111.96,502.41 1115.96,502.41 ; 1111.96,503.41 1115.96,503.41 ; 1111.96,504.41 1114.96,504.41 ; 1111.96,505.41 1114.96,505.41 ; 1111.96,506.41 1114.96,506.41 ; 1111.96,507.41 1114.96,507.41 ; 1111.96,508.41 1114.96,508.41 ; 1111.96,509.41 1114.96,509.41 ; 1111.96,510.41 1114.96,510.41 ; 1111.96,511.41 1114.96,511.41 ; 1111.96,512.41 1114.96,512.41 ; 1111.96,520.41 1117.96,520.41 ; 1112.96,368.41 1124.96,368.41 ; 1112.96,491.41 1116.96,491.41 ; 1112.96,492.41 1116.96,492.41 ; 1112.96,493.41 1116.96,493.41 ; 1112.96,521.41 1116.96,521.41 ; 1113.96,487.41 1118.96,487.41 ; 1113.96,488.41 1117.96,488.41 ; 1113.96,489.41 1116.96,489.41 ; 1113.96,490.41 1116.96,490.41 ; 1114.96,369.41 1125.96,369.41 ; 1115.96,485.41 1118.96,485.41 ; 1115.96,516.41 1121.96,516.41 ; 1116.96,514.41 1123.96,514.41 ; 1116.96,515.41 1122.96,515.41 ; 1117.96,370.41 1127.96,370.41 ; 1117.96,513.41 1124.96,513.41 ; 1118.96,512.41 1125.96,512.41 ; 1119.96,371.41 1129.96,371.41 ; 1119.96,511.41 1126.96,511.41 ; 1120.96,372.41 1132.96,372.41 ; 1121.96,510.41 1128.96,510.41 ; 1122.96,509.41 1128.96,509.41 ; 1123.96,373.41 1133.96,373.41 ; 1123.96,508.41 1129.96,508.41 ; 1124.96,374.41 1135.96,374.41 ; 1124.96,507.41 1130.96,507.41 ; 1125.96,506.41 1131.96,506.41 ; 1126.96,375.41 1136.96,375.41 ; 1126.96,504.41 1132.96,504.41 ; 1126.96,505.41 1132.96,505.41 ; 1127.96,376.41 1138.96,376.41 ; 1128.96,502.41 1134.96,502.41 ; 1128.96,503.41 1133.96,503.41 ; 1129.96,500.41 1135.96,500.41 ; 1129.96,501.41 1134.96,501.41 ; 1130.96,377.41 1140.96,377.41 ; 1130.96,499.41 1135.96,499.41 ; 1131.96,378.41 1142.96,378.41 ; 1131.96,497.41 1137.96,497.41 ; 1131.96,498.41 1136.96,498.41 ; 1132.96,496.41 1138.96,496.41 ; 1133.96,379.41 1143.96,379.41 ; 1133.96,495.41 1139.96,495.41 ; 1134.96,380.41 1144.96,380.41 ; 1134.96,445.41 1139.96,445.41 ; 1134.96,446.41 1140.96,446.41 ; 1134.96,494.41 1139.96,494.41 ; 1135.96,444.41 1137.96,444.41 ; 1135.96,447.41 1140.96,447.41 ; 1135.96,479.41 1142.96,479.41 ; 1135.96,480.41 1139.96,480.41 ; 1135.96,493.41 1140.96,493.41 ; 1136.96,381.41 1146.96,381.41 ; 1136.96,478.41 1144.96,478.41 ; 1136.96,491.41 1142.96,491.41 ; 1136.96,492.41 1141.96,492.41 ; 1137.96,448.41 1140.96,448.41 ; 1137.96,449.41 1140.96,449.41 ; 1137.96,450.41 1143.96,450.41 ; 1137.96,451.41 1144.96,451.41 ; 1137.96,452.41 1145.96,452.41 ; 1137.96,466.41 1151.96,466.41 ; 1137.96,467.41 1150.96,467.41 ; 1137.96,490.41 1143.96,490.41 ; 1138.96,382.41 1147.96,382.41 ; 1138.96,464.41 1152.96,464.41 ; 1138.96,465.41 1152.96,465.41 ; 1138.96,468.41 1150.96,468.41 ; 1138.96,469.41 1148.96,469.41 ; 1138.96,477.41 1147.96,477.41 ; 1138.96,489.41 1144.96,489.41 ; 1139.96,463.41 1152.96,463.41 ; 1139.96,476.41 1153.96,476.41 ; 1139.96,488.41 1144.96,488.41 ; 1140.96,383.41 1148.96,383.41 ; 1140.96,462.41 1152.96,462.41 ; 1140.96,470.41 1145.96,470.41 ; 1140.96,475.41 1154.96,475.41 ; 1140.96,486.41 1146.96,486.41 ; 1140.96,487.41 1145.96,487.41 ; 1141.96,384.41 1150.96,384.41 ; 1141.96,461.41 1152.96,461.41 ; 1141.96,485.41 1146.96,485.41 ; 1142.96,385.41 1152.96,385.41 ; 1142.96,453.41 1145.96,453.41 ; 1142.96,454.41 1145.96,454.41 ; 1142.96,474.41 1157.96,474.41 ; 1142.96,484.41 1147.96,484.41 ; 1143.96,460.41 1150.96,460.41 ; 1143.96,473.41 1161.96,473.41 ; 1143.96,482.41 1148.96,482.41 ; 1143.96,483.41 1148.96,483.41 ; 1144.96,386.41 1153.96,386.41 ; 1144.96,481.41 1149.96,481.41 ; 1145.96,387.41 1154.96,387.41 ; 1145.96,480.41 1150.96,480.41 ; 1146.96,472.41 1164.96,472.41 ; 1146.96,479.41 1151.96,479.41 ; 1147.96,388.41 1157.96,388.41 ; 1147.96,478.41 1151.96,478.41 ; 1148.96,477.41 1152.96,477.41 ; 1149.96,389.41 1158.96,389.41 ; 1149.96,471.41 1165.96,471.41 ; 1150.96,407.41 1156.96,407.41 ; 1150.96,408.41 1159.96,408.41 ; 1150.96,409.41 1161.96,409.41 ; 1151.96,390.41 1160.96,390.41 ; 1151.96,406.41 1155.96,406.41 ; 1151.96,410.41 1164.96,410.41 ; 1151.96,470.41 1167.96,470.41 ; 1153.96,391.41 1161.96,391.41 ; 1153.96,411.41 1167.96,411.41 ; 1154.96,469.41 1168.96,469.41 ; 1155.96,392.41 1163.96,392.41 ; 1155.96,412.41 1169.96,412.41 ; 1156.96,393.41 1164.96,393.41 ; 1156.96,461.41 1159.96,461.41 ; 1156.96,462.41 1161.96,462.41 ; 1156.96,463.41 1162.96,463.41 ; 1157.96,394.41 1165.96,394.41 ; 1157.96,413.41 1182.96,413.41 ; 1157.96,460.41 1159.96,460.41 ; 1157.96,468.41 1170.96,468.41 ; 1158.96,395.41 1167.96,395.41 ; 1158.96,414.41 1182.96,414.41 ; 1158.96,464.41 1162.96,464.41 ; 1158.96,465.41 1160.96,465.41 ; 1160.96,396.41 1168.96,396.41 ; 1160.96,415.41 1182.96,415.41 ; 1160.96,416.41 1181.96,416.41 ; 1160.96,417.41 1180.96,417.41 ; 1160.96,467.41 1171.96,467.41 ; 1161.96,418.41 1166.96,418.41 ; 1161.96,419.41 1167.96,419.41 ; 1162.96,397.41 1170.96,397.41 ; 1162.96,420.41 1168.96,420.41 ; 1162.96,421.41 1168.96,421.41 ; 1162.96,466.41 1172.96,466.41 ; 1163.96,398.41 1171.96,398.41 ; 1163.96,422.41 1168.96,422.41 ; 1163.96,423.41 1168.96,423.41 ; 1163.96,424.41 1169.96,424.41 ; 1164.96,425.41 1170.96,425.41 ; 1164.96,426.41 1171.96,426.41 ; 1164.96,465.41 1173.96,465.41 ; 1165.96,399.41 1173.96,399.41 ; 1165.96,427.41 1173.96,427.41 ; 1165.96,428.41 1174.96,428.41 ; 1166.96,400.41 1174.96,400.41 ; 1166.96,429.41 1176.96,429.41 ; 1166.96,430.41 1177.96,430.41 ; 1166.96,464.41 1173.96,464.41 ; 1167.96,401.41 1175.96,401.41 ; 1167.96,418.41 1179.96,418.41 ; 1167.96,431.41 1178.96,431.41 ; 1167.96,432.41 1179.96,432.41 ; 1167.96,463.41 1174.96,463.41 ; 1168.96,433.41 1180.96,433.41 ; 1168.96,434.41 1173.96,434.41 ; 1168.96,435.41 1174.96,435.41 ; 1168.96,461.41 1175.96,461.41 ; 1168.96,462.41 1174.96,462.41 ; 1169.96,402.41 1176.96,402.41 ; 1169.96,436.41 1175.96,436.41 ; 1169.96,437.41 1175.96,437.41 ; 1169.96,438.41 1175.96,438.41 ; 1169.96,439.41 1175.96,439.41 ; 1169.96,459.41 1175.96,459.41 ; 1169.96,460.41 1175.96,460.41 ; 1170.96,403.41 1177.96,403.41 ; 1170.96,440.41 1175.96,440.41 ; 1170.96,441.41 1176.96,441.41 ; 1170.96,442.41 1176.96,442.41 ; 1170.96,443.41 1176.96,443.41 ; 1170.96,444.41 1176.96,444.41 ; 1170.96,445.41 1176.96,445.41 ; 1170.96,446.41 1177.96,446.41 ; 1170.96,447.41 1177.96,447.41 ; 1170.96,455.41 1176.96,455.41 ; 1170.96,456.41 1176.96,456.41 ; 1170.96,457.41 1176.96,457.41 ; 1170.96,458.41 1176.96,458.41 ; 1171.96,404.41 1178.96,404.41 ; 1171.96,448.41 1177.96,448.41 ; 1171.96,449.41 1178.96,449.41 ; 1171.96,450.41 1181.96,450.41 ; 1171.96,451.41 1185.96,451.41 ; 1171.96,452.41 1192.96,452.41 ; 1171.96,453.41 1192.96,453.41 ; 1171.96,454.41 1176.96,454.41 ; 1172.96,405.41 1178.96,405.41 ; 1172.96,512.41 1175.96,512.41 ; 1172.96,513.41 1175.96,513.41 ; 1172.96,514.41 1175.96,514.41 ; 1173.96,406.41 1179.96,406.41 ; 1173.96,419.41 1174.96,419.41 ; 1173.96,509.41 1176.96,509.41 ; 1173.96,510.41 1176.96,510.41 ; 1173.96,511.41 1175.96,511.41 ; 1173.96,515.41 1176.96,515.41 ; 1173.96,516.41 1176.96,516.41 ; 1174.96,407.41 1180.96,407.41 ; 1174.96,434.41 1181.96,434.41 ; 1174.96,508.41 1177.96,508.41 ; 1174.96,517.41 1177.96,517.41 ; 1174.96,518.41 1179.96,518.41 ; 1175.96,408.41 1180.96,408.41 ; 1175.96,409.41 1181.96,409.41 ; 1175.96,412.41 1182.96,412.41 ; 1175.96,435.41 1182.96,435.41 ; 1175.96,507.41 1180.96,507.41 ; 1176.96,410.41 1182.96,410.41 ; 1176.96,411.41 1182.96,411.41 ; 1176.96,436.41 1183.96,436.41 ; 1176.96,506.41 1187.96,506.41 ; 1176.96,519.41 1181.96,519.41 ; 1177.96,437.41 1184.96,437.41 ; 1177.96,520.41 1181.96,520.41 ; 1178.96,438.41 1185.96,438.41 ; 1178.96,454.41 1191.96,454.41 ; 1178.96,505.41 1186.96,505.41 ; 1179.96,439.41 1186.96,439.41 ; 1179.96,521.41 1181.96,521.41 ; 1180.96,440.41 1187.96,440.41 ; 1181.96,441.41 1188.96,441.41 ; 1181.96,455.41 1190.96,455.41 ; 1182.96,442.41 1189.96,442.41 ; 1182.96,485.41 1185.96,485.41 ; 1182.96,486.41 1185.96,486.41 ; 1182.96,487.41 1185.96,487.41 ; 1182.96,519.41 1186.96,519.41 ; 1182.96,520.41 1184.96,520.41 ; 1183.96,443.41 1189.96,443.41 ; 1183.96,456.41 1189.96,456.41 ; 1183.96,483.41 1186.96,483.41 ; 1183.96,484.41 1185.96,484.41 ; 1183.96,488.41 1187.96,488.41 ; 1184.96,444.41 1190.96,444.41 ; 1184.96,482.41 1188.96,482.41 ; 1184.96,489.41 1187.96,489.41 ; 1184.96,518.41 1186.96,518.41 ; 1185.96,445.41 1191.96,445.41 ; 1185.96,446.41 1191.96,446.41 ; 1185.96,481.41 1192.96,481.41 ; 1185.96,507.41 1188.96,507.41 ; 1186.96,447.41 1191.96,447.41 ; 1186.96,508.41 1189.96,508.41 ; 1187.96,448.41 1192.96,448.41 ; 1187.96,449.41 1192.96,449.41 ; 1187.96,450.41 1192.96,450.41 ; 1187.96,451.41 1192.96,451.41 ; 1187.96,509.41 1189.96,509.41 ; 1187.96,512.41 1190.96,512.41 ; 1187.96,513.41 1189.96,513.41 ; 1187.96,514.41 1189.96,514.41 ; 1187.96,515.41 1189.96,515.41 ; 1188.96,480.41 1191.96,480.41 ; 1188.96,510.41 1190.96,510.41 ; 1188.96,511.41 1190.96,511.41 ; 1190.96,482.41 1193.96,482.41 ; 1190.96,488.41 1193.96,488.41 ; 1191.96,483.41 1193.96,483.41 ; 1191.96,484.41 1193.96,484.41 ; 1191.96,485.41 1193.96,485.41 ; 1191.96,486.41 1193.96,486.41 ; 1191.96,487.41 1193.96,487.41

## Polygon pours and split planes (outlines as drawn)
GND on Top Layer "GND_L01_P000" (solid, remove dead copper, pour order 0): 39.37,196.85 78.74,236.22 915.35,236.22 974.41,295.28 1407.48,295.28 1437.01,265.75 1437.01,-521.65 1397.64,-561.02 68.9,-561.02 39.37,-531.5 39.37,-423.23
GND on Bottom Layer "GND_L02_P001" (solid, remove dead copper, pour order 1): 68.9,-561.02 39.37,-531.5 39.37,196.85 78.74,236.22 915.35,236.22 1003.94,324.8 1407.48,324.8 1437.01,295.28 1437.01,-521.65 1397.64,-561.02

## Keep-outs
Keep-Out Layer:
  circle w10: c1279.53,354.33 r49.21
  lines w10: 39.37,-531.5 68.9,-561.02 1289.37,-561.02 1309.06,-541.34 1328.74,-541.34 1348.43,-561.02 1397.64,-561.02 1437.01,-521.65 1437.01,521.65 1397.64,561.02 1348.43,561.02 1328.74,541.34 1309.06,541.34 1289.37,561.02 59.06,561.02 39.37,541.34 39.37,-531.5

## Other copper
Top Layer:
  region net 3V3: 1047.24,-208.66 1051.18,-204.72 1078.74,-204.72 1082.68,-208.66 1082.68,-314.96 1094.49,-326.77 1188.98,-326.77 1279.53,-236.22 1409.45,-236.22 1417.32,-244.09 1417.32,-511.81 1409.45,-519.68 1240.16,-519.68 1232.28,-511.81 1232.28,-405.51 1188.98,-362.2 1051.18,-362.2 1047.24,-358.27
Bottom Layer:
  text "PCB Designed by Misaka" at 870.94,509.04 h80

## Silkscreen, mask and mechanical layers (free items; w line width, h text height)
Bottom Overlay:
  text "JLCJLCJLCJLC" at 779.75,167.8 h60
Top Solder:
  region: 246.06,561.02 246.06,265.75 265.75,246.06 915.35,246.06 935.04,265.75 935.04,561.02
Bottom Solder:
  drawing of 1076 lines, arcs and shapes, not listed
  text "SD²" at 80,50 h150 r270
  text "V1.2" at 157.5,-15 h40 r270
  text "星蓝工作室" at 82,-280.77 h60 r270
Mechanical 1:
  circle w10: c1279.53,354.33 r49.21
  lines w10: 39.37,-531.5 39.37,541.34 59.06,561.02 1289.37,561.02 1309.06,541.34 1328.74,541.34 1348.43,561.02 1397.64,561.02 1437.01,521.65 1437.01,-521.65 1397.64,-561.02 1348.43,-561.02 1328.74,-541.34 1309.06,-541.34 1289.37,-561.02 68.9,-561.02 39.37,-531.5
Mechanical 15:
  lines w10: -39.37,0 1545.28,0

## Text inside footprints (layer, text, board x,y; h text height)
LCD1: Top Overlay "1" at 210.94,147.65 h50 r90; Top Overlay "12" at 210.94,-166.92 h50 r90